# Altium PCB generic-usb-hub.PcbDoc
Units mil, origin at the board's own origin, x right, y up, seen from the top; angles counter-clockwise.
Board outline 1574.8 x 1574.8 mil, 2 copper layers (Top Layer, Bottom Layer); 73 components, 47 nets, 229 pads, 50 vias.
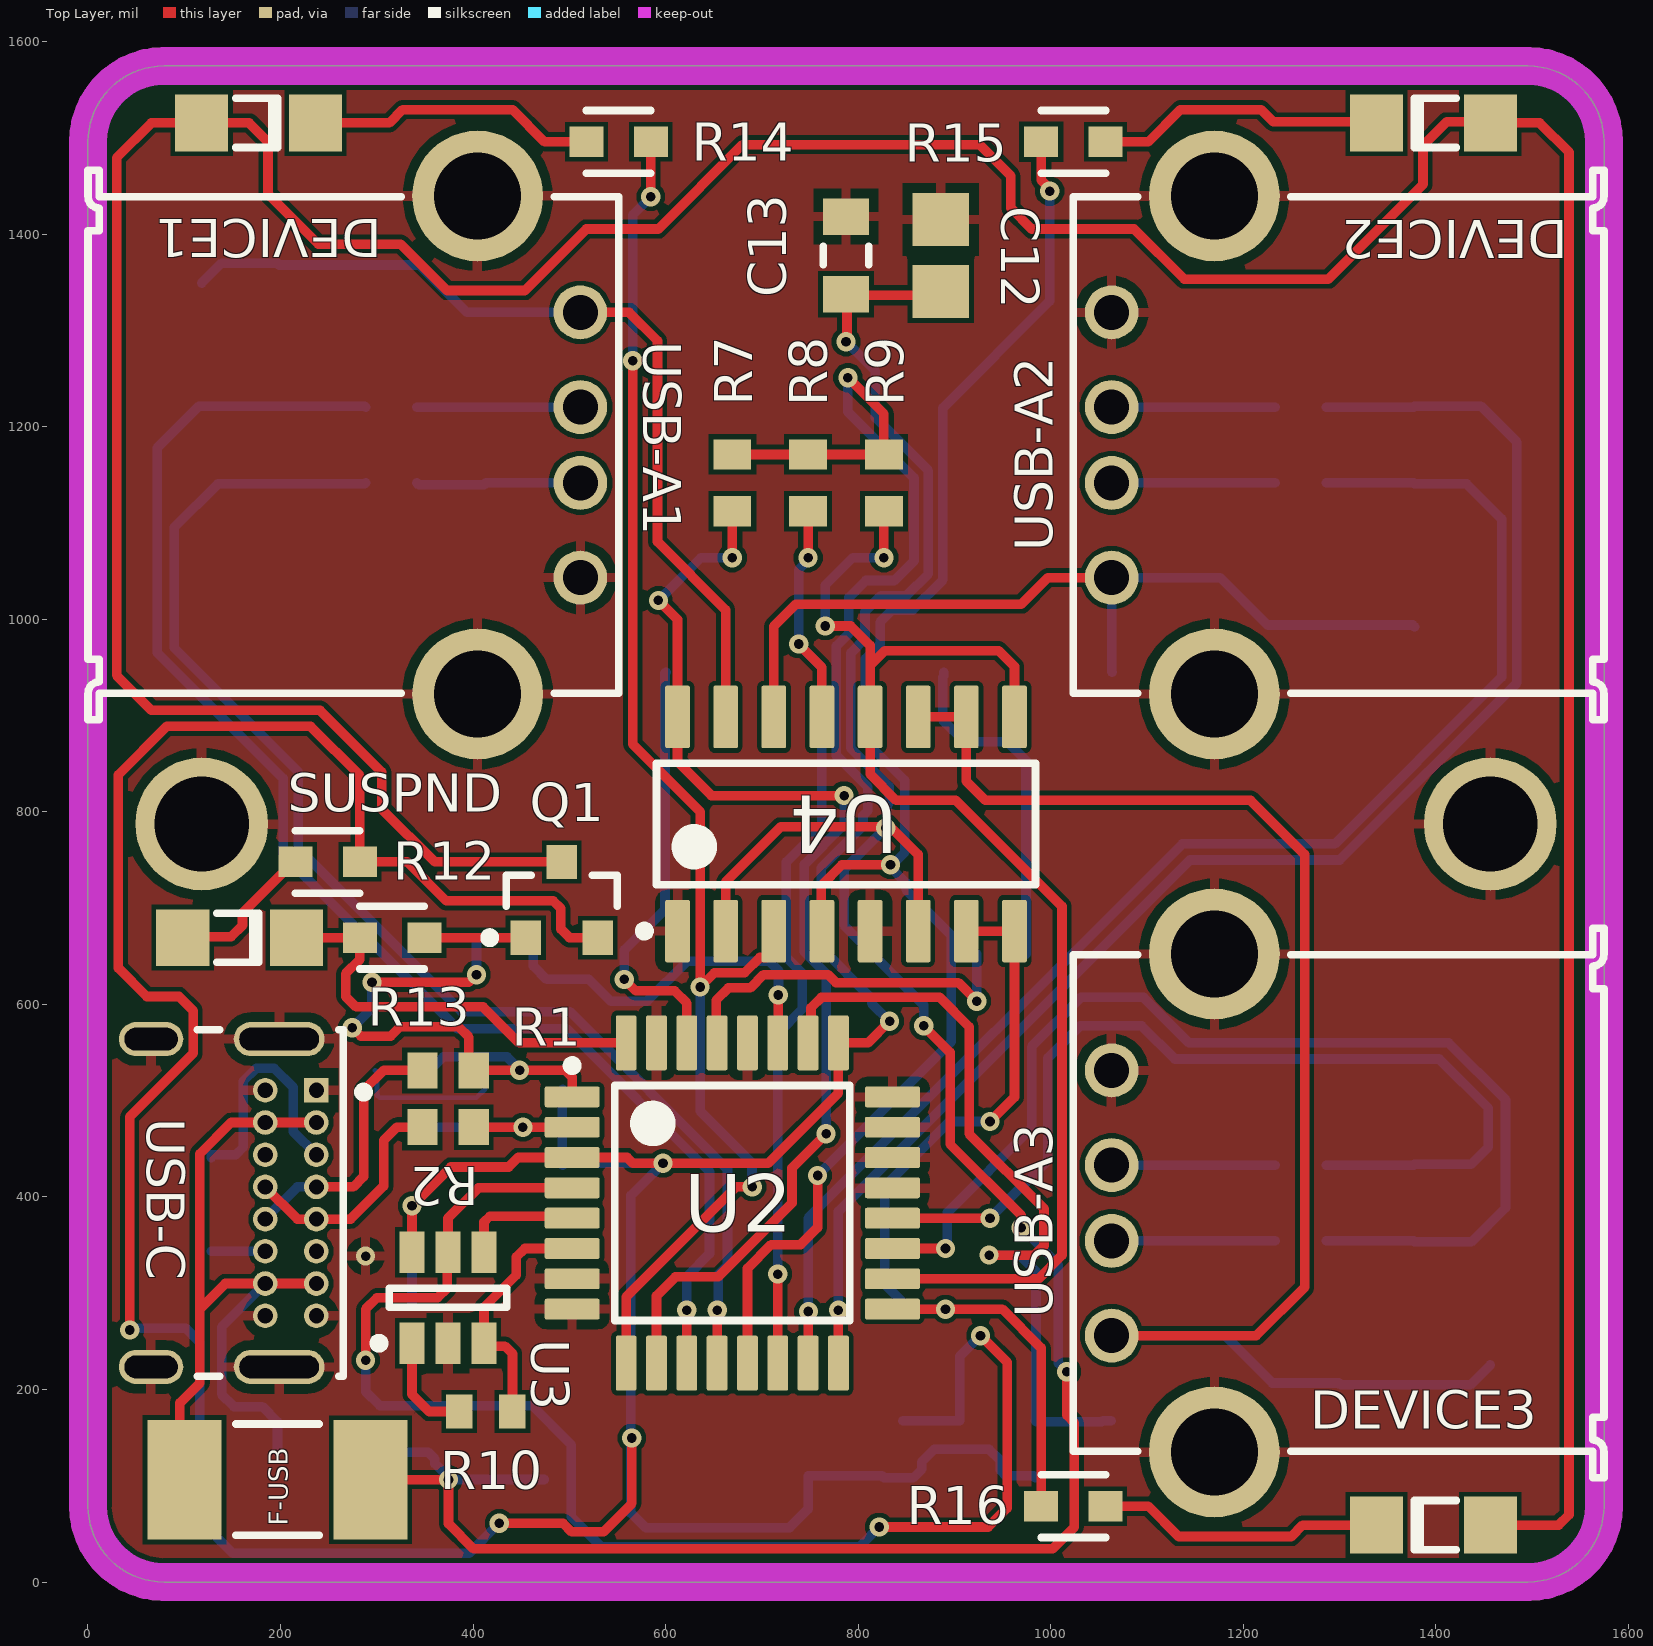
[diagram p0: Top Layer view]
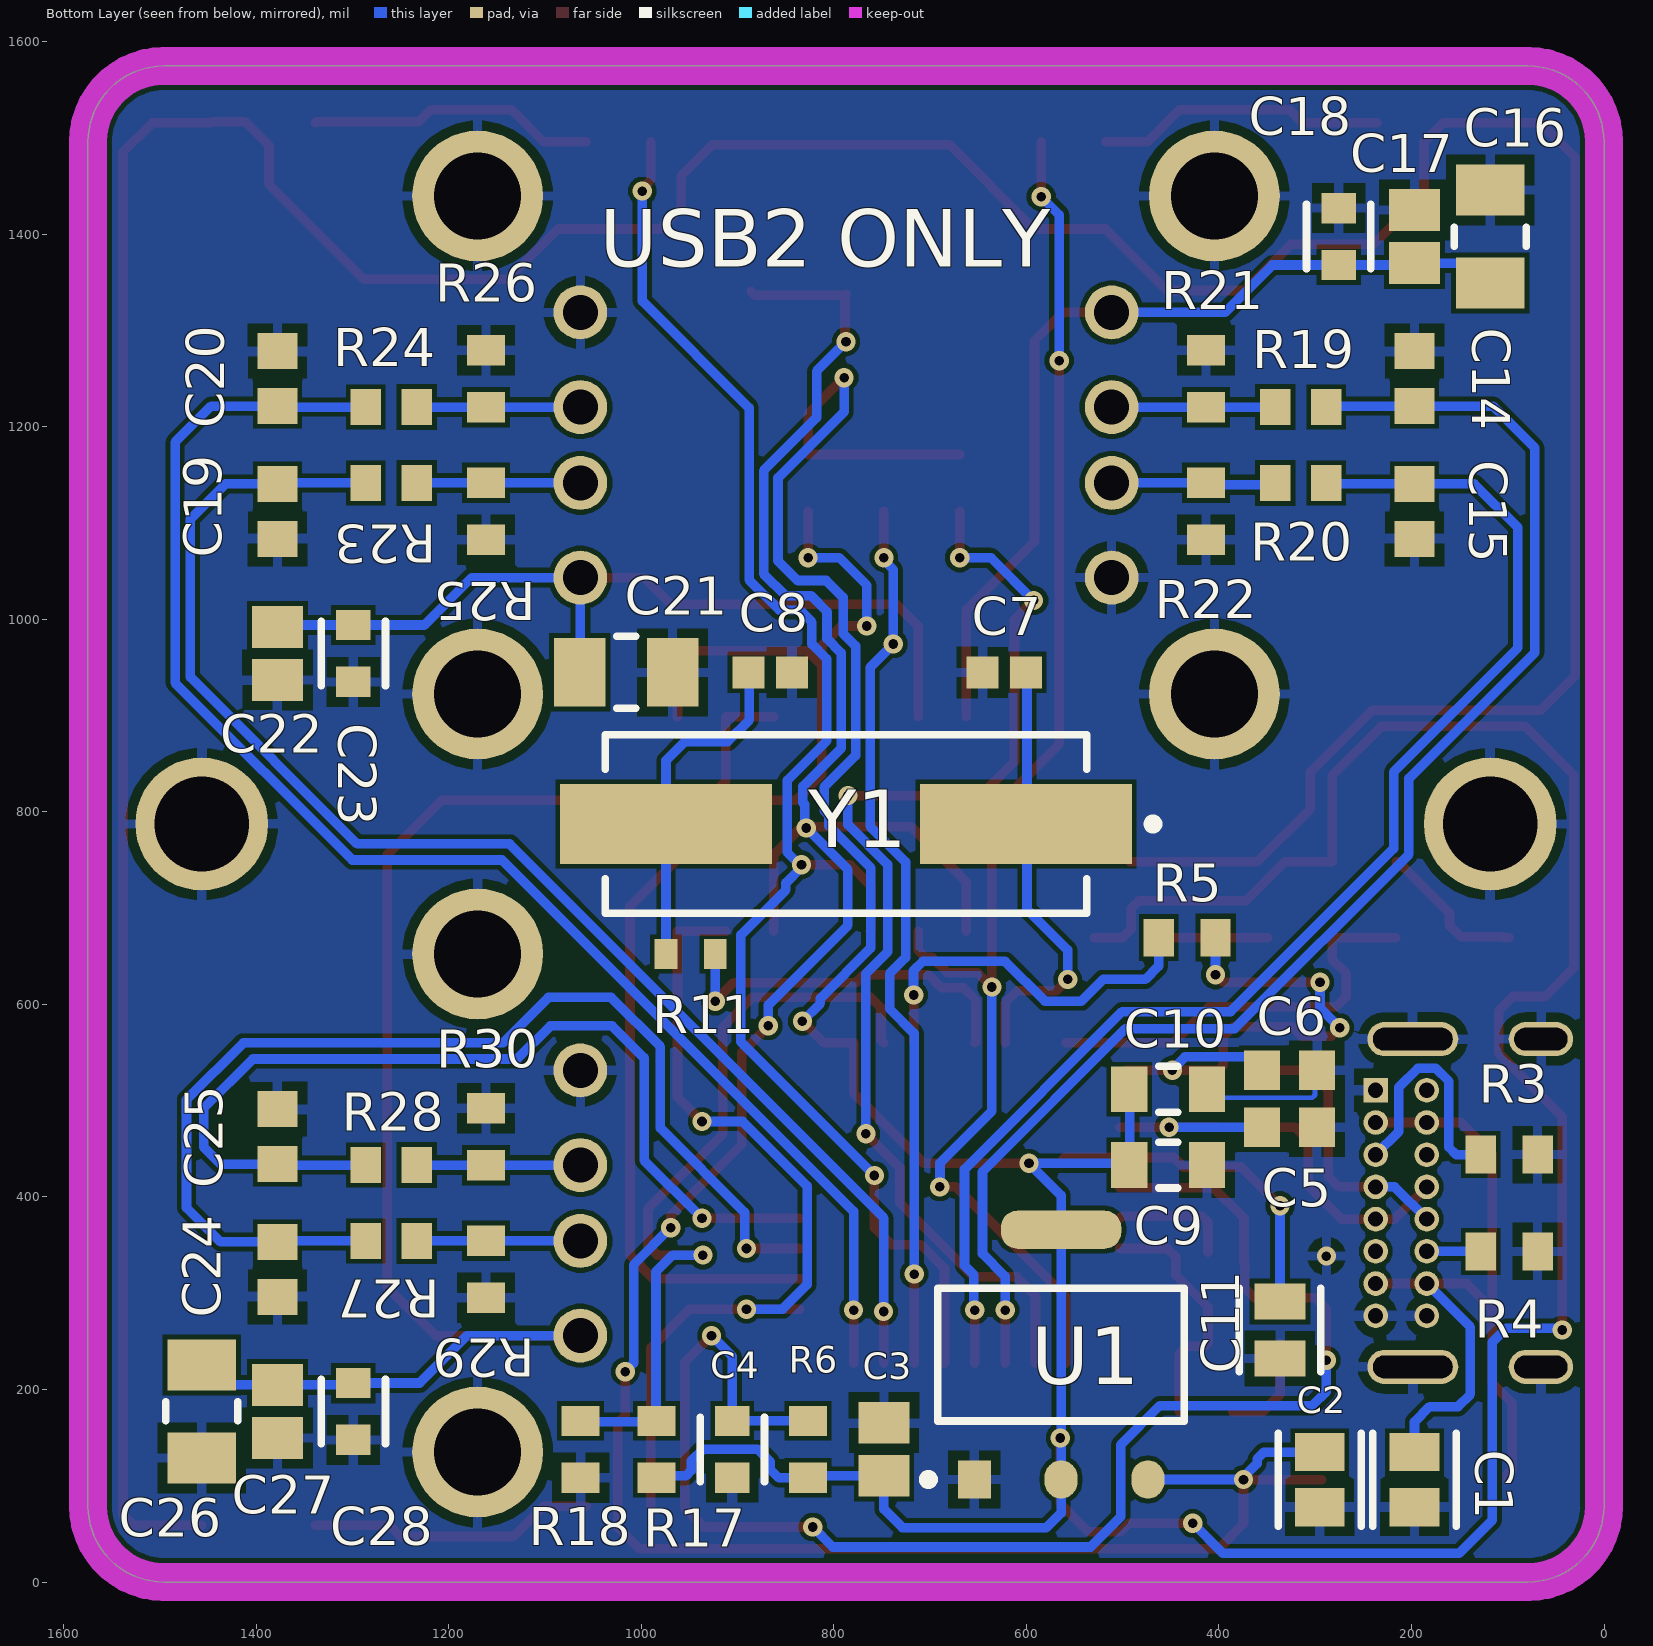
[diagram p1: Bottom Layer view, seen from below]
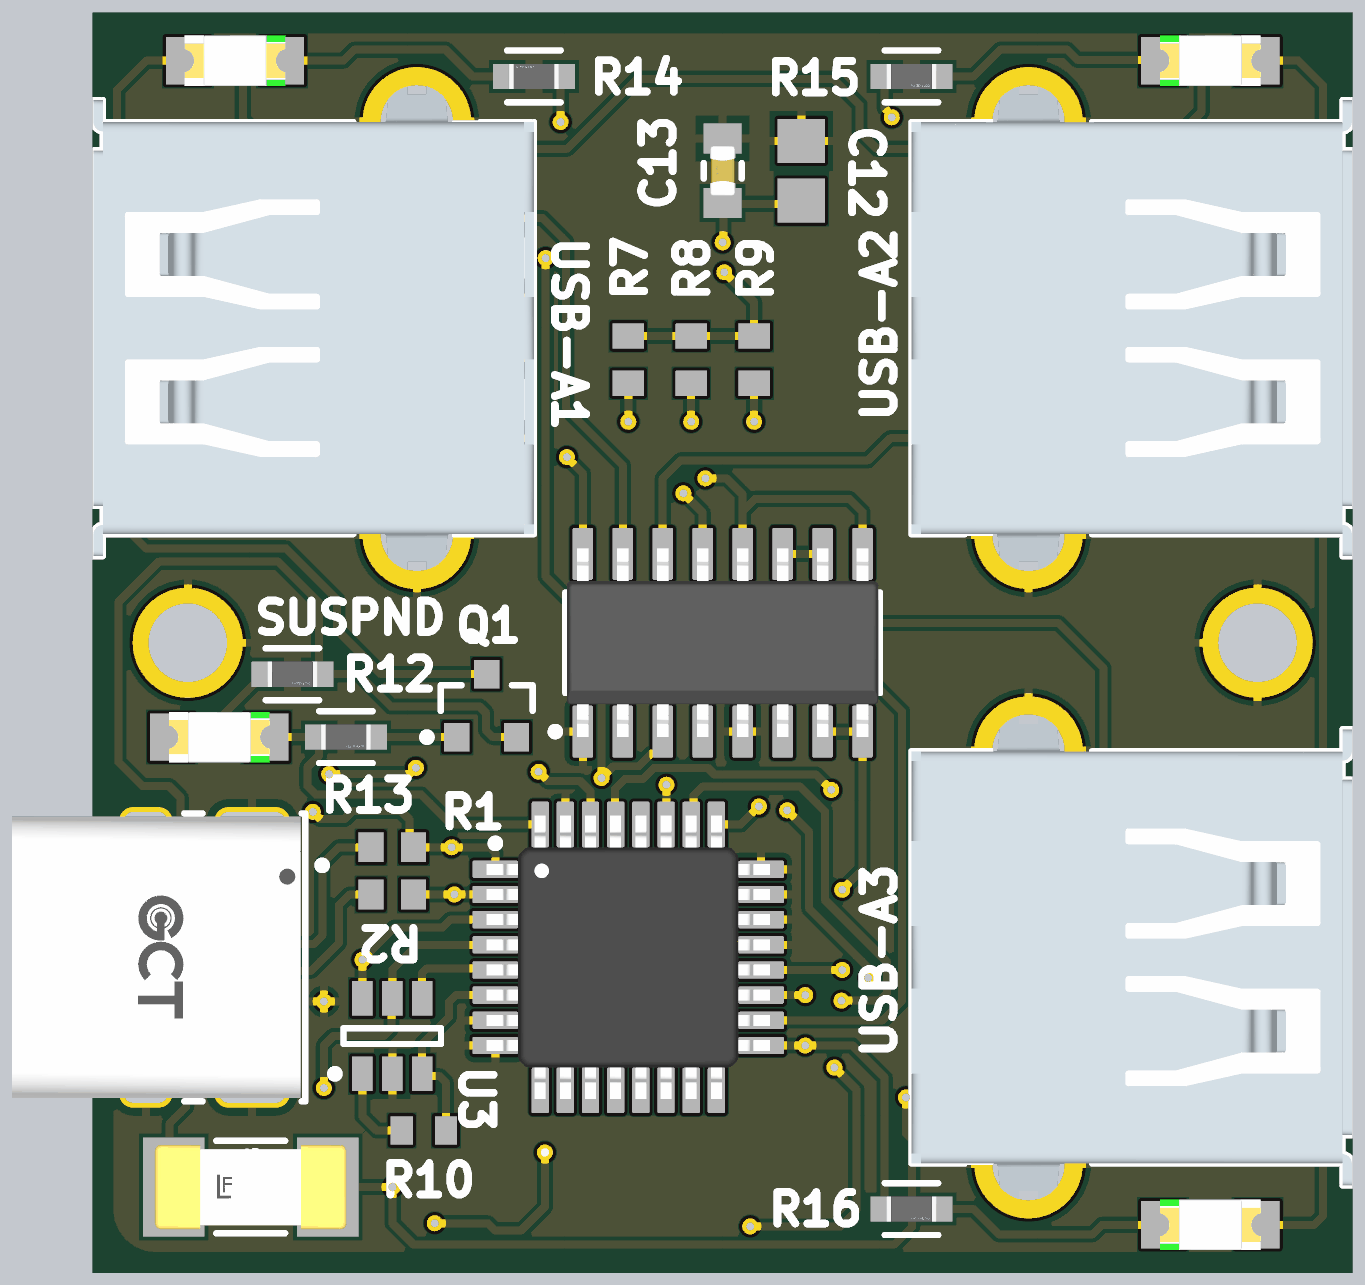
[diagram p2: 3D render of the assembled board from above, using the file's embedded part models]
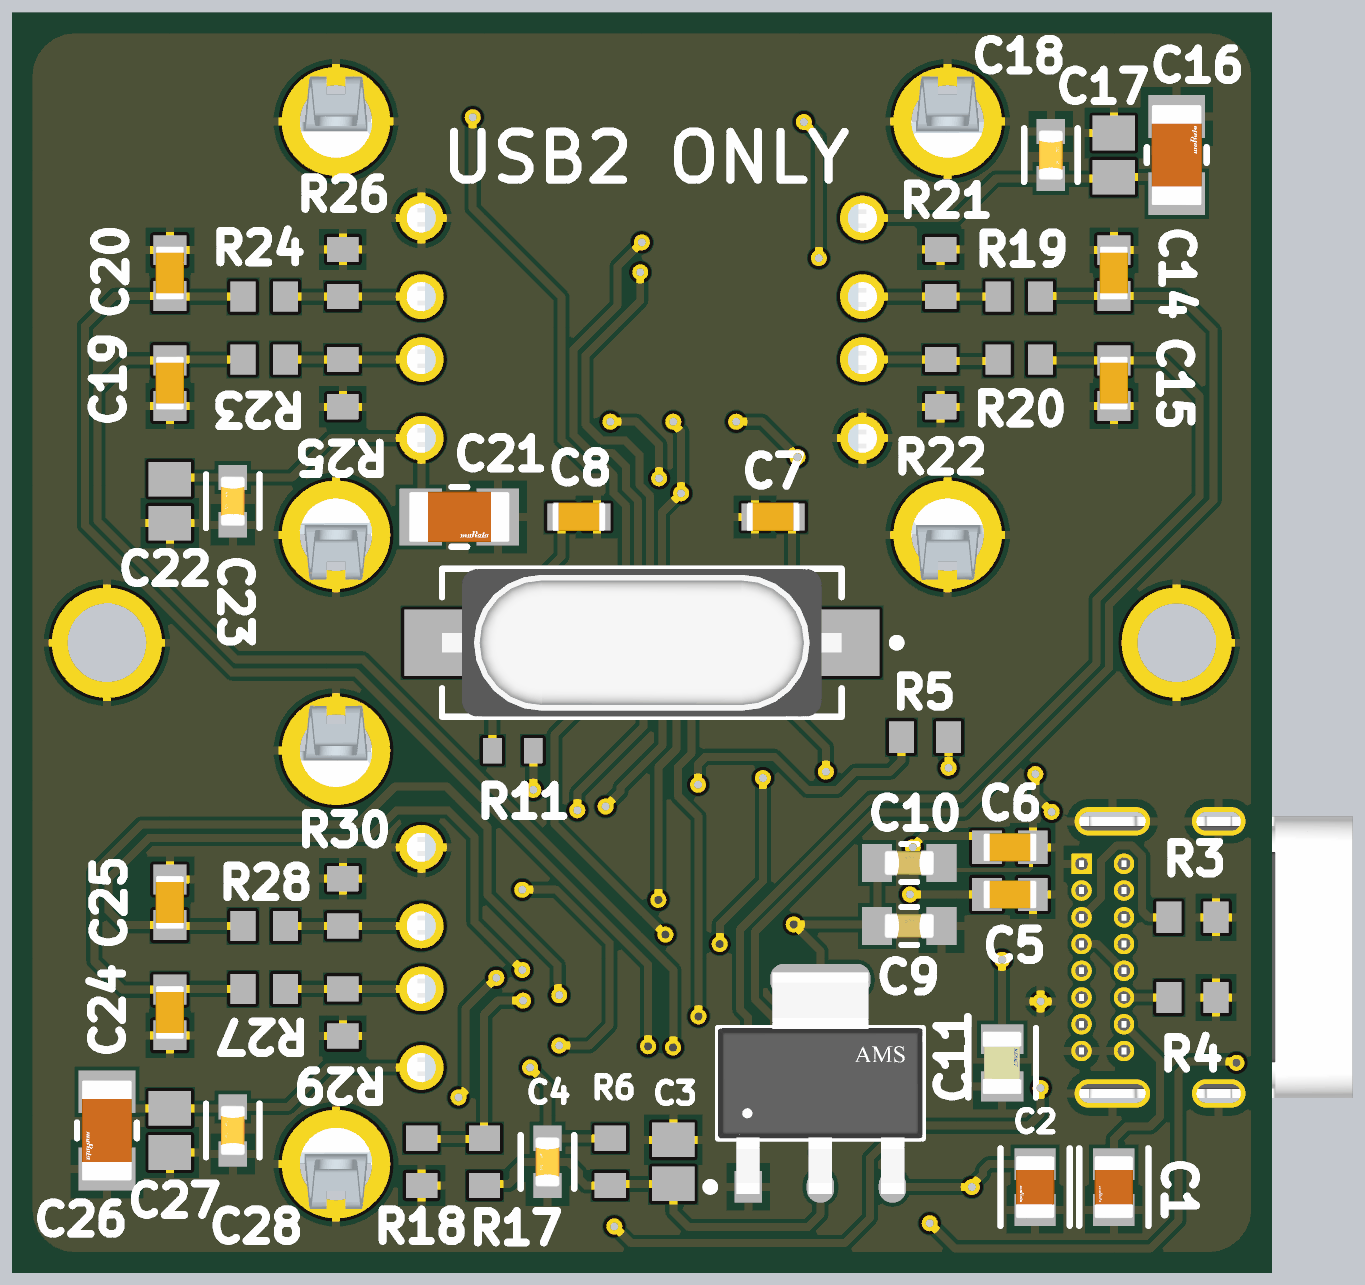
[diagram p3: 3D render of the assembled board from below, using the file's embedded part models]

## Layer stack, top to bottom
Top Solder: solder mask 0.4, Solder Resist, Dk 3.5
Top Layer: signal copper 1.4
Dielectric 1: dielectric 12.6, FR-4, Dk 4.8
Bottom Layer: signal copper 1.4
Bottom Solder: solder mask 0.4, Solder Resist, Dk 3.5

## Board outline
1496.06,0 ccw(c1496.06,78.74) 1574.8,78.74 1574.8,1496.06 ccw(c1496.06,1496.06) 1496.06,1574.8 78.74,1574.8 ccw(c78.74,1496.06) 0,1496.06 0,78.74 ccw(c78.74,78.74) 78.74,0

## Design rules (kind name [scope] priority, off if disabled: settings)
Clearance [All] p1: gap=5 ignorepadtopadclearanceinfootprint=FALSE except(0: Arc-Hole Track-Hole SMDPad-Hole THPad-Hole Via-Hole Fill-Hole Poly-Hole Region-Hole Text-Hole)
PolygonConnect [All] p1: connectstyle=Relief reliefconductorwidth=10 reliefentries=4 polygonreliefangle="90 Angle" airgapwidth=10
RoutingVias [All] p1: holewidth=28 width=50 viastyle="Through Hole" minholewidth=28 minwidth=50 maxholewidth=28 maxwidth=50
SolderMaskExpansion [All] p1: expansion=4 istentingtop=FALSE
Width [All] p1: maxlimit=10 minlimit=5 preferedwidth=10 minimp=50.000000 maximp=50.000000 favimp=50.000000
30 further rules are at their usual default settings.

## Components (designator, comment, footprint, x,y, rotation, side; value= is the part's Value field where it differs from the comment)
C1 "10uF 25V 0805" FP-GRM21B-0_15-IPC_C 196.85,106.3 r270 bottom
C2 "10uF 25V 0805" FP-GRM21B-0_15-IPC_C 295.28,106.3 r270 bottom
C3 "47uF 6.3V 0805" CAPC2013X145X50LL20T25 748.03,137.8 r270 bottom
C4 "1uF 16V 0603" FP-CC0603-DA-MFG 905.51,137.8 r270 bottom value="1 uF"
C5 "22pF 50V 0603" CAPC1608X90X35ML10T15 326.77,472.44 r0 bottom
C6 "22pF 50V 0603" CAPC1608X90X35ML10T15 326.77,531.5 r0 bottom
C7 "33pF 50V 0603" CAPC1608X90X40LL10T20 623.03,944.88 r180 bottom
C8 "33pF 50V 0603" CAPC1608X90X40LL10T20 866.14,944.88 r0 bottom
C9 "100nF 50V 0603" FP-CGA3E-0_3-0_1-IPC_A 452.76,433.07 r180 bottom
C10 "100nF 50V 0603" FP-CGA3E-0_3-0_1-IPC_A 452.76,511.81 r180 bottom
C11 "100nF 50V 0805" FP-C0805C-DN-MFG 336.61,261.81 r270 bottom value="0.10 μF"
C12 "4.7uF 25V 0805" CAPC2013X135X45ML10T25 885.83,1377.95 r270 top
C13 "100nF 50V 0603" FP-CGA3E-0_3-0_1-IPC_A 787.4,1377.95 r90 top
C14 "22pF 50V 0603" CAPC1608X90X35ML10T15 196.85,1250 r270 bottom
C15 "22pF 50V 0603" CAPC1608X90X35ML10T15 196.85,1112.2 r90 bottom
C16 "220uF 6.3V 1206" FP-GRM31C-0_3-e0_3_0_9-IPC_C 118.11,1397.64 r90 bottom
C17 "47uF 6.3V 0805" CAPC2013X145X50LL20T25 196.85,1397.64 r270 bottom
C18 "10nF 50V 0603" FP-CC0603-DA-MFG 275.59,1397.64 r90 bottom value="10 nF"
C19 "22pF 50V 0603" CAPC1608X90X35ML10T15 1377.95,1112.2 r90 bottom
C20 "22pF 50V 0603" CAPC1608X90X35ML10T15 1377.95,1250 r270 bottom
C21 "220uF 6.3V 1206" FP-GRM31C-0_3-e0_3_0_9-IPC_C 1015.75,944.88 r180 bottom
C22 "47uF 6.3V 0805" CAPC2013X145X50LL20T25 1377.95,964.57 r90 bottom
C23 "10nF 50V 0603" FP-CC0603-DA-MFG 1299.21,964.57 r270 bottom value="10 nF"
C24 "22pF 50V 0603" CAPC1608X90X35ML10T15 1377.95,324.8 r90 bottom
C25 "22pF 50V 0603" CAPC1608X90X35ML10T15 1377.95,462.6 r270 bottom
C26 "220uF 6.3V 1206" FP-GRM31C-0_3-e0_3_0_9-IPC_C 1456.69,177.17 r270 bottom
C27 "47uF 6.3V 0805" CAPC2013X145X50LL20T25 1377.95,177.17 r90 bottom
C28 "10nF 50V 0603" FP-CC0603-DA-MFG 1299.21,177.17 r270 bottom value="10 nF"
DEVICE1 "150120BS75000" 1206_A 177.17,1515.75 r180 top
DEVICE2 "150120BS75000" 1206_A 1397.64,1515.75 r0 top
DEVICE3 "150120BS75000" 1206_A 1397.64,59.06 r0 top
F-USB "0451002.MRL" FP-0451-MFG 196.85,106.3 r0 top value=0.0367Ω
Q1 "MMBT3906LT1G" ONSC-SOT-23-3-318-08_V 492.13,708.66 r90 top
R1 "27R 1% 0603" RESC1608X55X30NL15T15 374.02,531.5 r0 top
R2 "27R 1% 0603" RESC1608X55X30NL15T15 374.02,472.44 r0 top
R3 "5K1 1% 0603" RESC1608X55X25ML10T15 98.43,443.9 r0 bottom
R4 "5K1 1% 0603" RESC1608X55X25ML10T15 98.43,343.5 r0 bottom
R5 "1K5 1% 0603" RESC1608X55X25ML10T15 433.07,669.29 r0 bottom
R6 "15K 1% 0603" RESC1608X55X25ML10T15 826.77,137.8 r90 bottom
R7 "15K 1% 0603" RESC1608X55X25ML10T15 669.29,1141.73 r90 top
R8 "15K 1% 0603" RESC1608X55X25ML10T15 748.03,1141.73 r90 top
R9 "15K 1% 0603" RESC1608X55X25ML10T15 826.77,1141.73 r90 top
R10 "1K 1% 0603" RESC1608X55X25NL10T15 413.39,177.17 r180 top
R11 "2K2 1% 0603" RESC1608X55X25LL10T15 948.82,652.36 r180 bottom
R12 "510R 1% 0603" FP-AC0603-MFG 249.02,748.03 r0 top value=510Ω
R13 "510R 1% 0603" FP-AC0603-MFG 315.94,669.29 r0 top value=510Ω
R14 "510R 1% 0603" FP-AC0603-MFG 551.18,1496.06 r180 top value=510Ω
R15 "510R 1% 0603" FP-AC0603-MFG 1023.62,1496.06 r0 top value=510Ω
R16 "510R 1% 0603" FP-AC0603-MFG 1023.62,78.74 r0 top value=510Ω
R17 "100R 1% 0603" RESC1608X55X25ML10T15 984.25,137.8 r270 bottom
R18 "100R 1% 0603" RESC1608X55X25ML10T15 1062.99,137.8 r90 bottom
R19 "27R 1% 0603" RESC1608X55X30NL15T15 314.96,1220.47 r0 bottom
R20 "27R 1% 0603" RESC1608X55X30NL15T15 314.96,1141.73 r0 bottom
R21 "15K 1% 0603" RESC1608X55X25ML10T15 413.39,1250 r270 bottom
R22 "15K 1% 0603" RESC1608X55X25ML10T15 413.39,1112.2 r90 bottom
R23 "27R 1% 0603" RESC1608X55X30NL15T15 1259.84,1141.73 r180 bottom
R24 "27R 1% 0603" RESC1608X55X30NL15T15 1259.84,1220.47 r180 bottom
R25 "15K 1% 0603" RESC1608X55X25ML10T15 1161.42,1112.2 r90 bottom
R26 "15K 1% 0603" RESC1608X55X25ML10T15 1161.42,1250 r270 bottom
R27 "27R 1% 0603" RESC1608X55X30NL15T15 1259.84,354.33 r180 bottom
R28 "27R 1% 0603" RESC1608X55X30NL15T15 1259.84,433.07 r180 bottom
R29 "15K 1% 0603" RESC1608X55X25ML10T15 1161.42,324.8 r90 bottom
R30 "15K 1% 0603" RESC1608X55X25ML10T15 1161.42,462.6 r270 bottom
SUSPND "150120SS75000" 1206_A 157.48,669.29 r180 top
U1 "AMS1117-3.3" FP-AMS1117-IPC_C 563.98,236.22 r90 bottom
U2 "TUSB2036VF" VF0032A_N 669.29,393.7 r0 top
U3 "93AA46BT-I/OT" SOT-23-OT6_N 374.02,295.28 r90 top
U4 "TPS2044BDR" D0016A_M 787.4,787.4 r90 top
USB-A1 "61400416021" 61400416021 275.59,1181.1 r270 top
USB-A2 "61400416021" 61400416021 1299.21,1181.1 r90 top
USB-A3 "61400416021" 61400416021 1299.21,393.7 r90 top
USB-C "USB4085-GF-A" FP-USB4085-GF-A-MFG 78.74,393.7 r270 top
Y1 "HC49USM-FF3F18-6.000MHZ" ABRA-ABLS-14.7456MHZ-B2-T_V 787.4,787.4 r0 bottom

## Footprints (in the part's own frame and the unit in brackets; to place one, negate y for a bottom-side part, rotate by r counter-clockwise, add the part's x,y. Pads: shape width x height; smd on the part's side, far side on the other; paste and mask are expansions set on the pad)
1206_A [mm] "Chip LED, 2-Leads, Body 3.2x1.6mm, IPC Medium Density"
  rect 1.4x1.5 smd: 1(-1.5,0) 2(1.5,0)
  silkscreen extent -0.5,-0.67 0.6,0.65, body extent -1.6,-0.8 1.6,0.8, height 0.68
61400416021 [mm] "USB 2.0 Type A Horizontal"
  round 1.42 hole 0.92: 1(-3.5,5.99) 2(-1,5.99) 3(1,5.99) 4(3.5,5.99)
  round 3.45 hole 2.3: Shell(-6.57,3.28) Shell(6.57,3.28)
  silkscreen extent -7.25,-7 7.25,7, body extent -8,-7 8,7, height 7.63
ABRA-ABLS-14.7456MHZ-B2-T_V [mm] "SMD, 2-Leads, Body 11.4x4.7mm"
  rect 5.6x2.1 smd: 1(-4.75,0) 2(4.75,0)
  silkscreen extent -8.22,-2.35 6.35,2.35, body extent -6.35,-2.35 6.35,2.35, height 4.16
CAPC1608X90X35ML10T15 [mm] "Chip Capacitor, 2-Leads, Body 1.7x0.9mm, IPC Low Density"
  rect 0.95x1.05 smd: 1(-0.725,0) 2(0.725,0)
  body extent -0.85,-0.45 0.85,0.45, height 0.9
CAPC1608X90X40LL10T20 [mm] "Chip Capacitor, 2-Leads, Body 1.70x0.90mm, IPC High Density"
  rect 0.85x0.85 smd: 1(-0.575,0) 2(0.575,0)
  body extent -0.85,-0.45 0.85,0.45, height 0.9
CAPC2013X135X45ML10T25 [mm] "Chip Capacitor, 2-Leads, Body 2.00x1.25mm, IPC Low Density"
  rect 1.4x1.5 smd: 1(-0.95,0) 2(0.95,0)
  body extent -1.05,-0.67 1.05,0.67, height 1.35
CAPC2013X145X50LL20T25 [mm] "Chip Capacitor, 2-Leads, Body 2.00x1.25mm, IPC High Density"
  rect 1.1x1.35 smd: 1(-0.7,0) 2(0.7,0)
  body extent -1.1,-0.72 1.1,0.72, height 1.45
D0016A_M [mm] "SOIC, 16-Leads, Body 10x4mm, Pitch 1.27mm, IPC Low Density"
  rrect15% 1.65x0.65 smd: 1(-2.825,4.445) 2(-2.825,3.175) 3(-2.825,1.905) 4(-2.825,0.635) 5(-2.825,-0.635) 6(-2.825,-1.905) 7(-2.825,-3.175) 8(-2.825,-4.445) 9(2.825,-4.445) 10(2.825,-3.175) 11(2.825,-1.905) 12(2.825,-0.635) 13(2.825,0.635) 14(2.825,1.905) 15(2.825,3.175) 16(2.825,4.445)
  silkscreen extent -2.95,-5 1.6,5.44, body extent -3,-4.95 3,4.95, height 1.59
FP-0451-MFG [mil]
  rect 77x124 smd paste+0 mask+0: 1(-96.5,0) 2(96.5,0)
  silkscreen extent -43,-58 43,58, body extent -139,-66 139,66, height 10
FP-AC0603-MFG [mm]
  rect 0.9x0.8 smd paste+0 mask+0: 1(-0.85,0) 2(0.85,0)
  silkscreen extent -0.85,-0.82 0.85,0.82, body extent -1.4,-0.55 1.4,0.55, height 0.25
FP-AMS1117-IPC_C [mm]
  rect 1.004x0.872 smd paste+0 mask+0: 1(-3.295,2.29)
  rrect100% 1.004x0.872 smd paste+0 mask+0: 2(-3.295,0) 3(-3.295,-2.29)
  rrect87% 1.004x3.182 smd paste+0 mask+0: 4(3.295,0)
  silkscreen extent -3.42,-3.25 1.75,3.63, body extent -3.53,-3.25 3.53,3.25, height 1.8
FP-C0805C-DN-MFG [mm]
  rect 0.95x1.35 smd paste+0 mask+0: 1(-0.75,0) 2(0.75,0)
  silkscreen extent -1.1,-1.07 1.1,1.07, body extent -1,-0.63 1,0.63, height 0.88
FP-CC0603-DA-MFG [mm]
  rect 0.8x0.9 smd paste+0 mask+0: 1(-0.75,0) 2(0.75,0)
  silkscreen extent -0.85,-0.85 0.85,0.85, body extent -0.8,-0.4 0.8,0.4, height 0.9
FP-CGA3E-0_3-0_1-IPC_A [mm]
  rect 0.956x1.206 smd paste+0 mask+0: 1(-1.025,0) 2(1.025,0)
  silkscreen extent -0.25,-0.6 0.25,0.6, body extent -0.8,-0.4 0.8,0.4, height 1.1
FP-GRM21B-0_15-IPC_C [mil]
  rect 39.6x51.5 smd paste+0 mask+0: 1(-28.59,0) 2(28.59,0)
  silkscreen extent -48,-43 48,43, body extent -39,-25 39,25, height 55
FP-GRM31C-0_3-e0_3_0_9-IPC_C [mil]
  rect 53.28x71.03 smd paste+0 mask+0: 1(-48.25,0) 2(48.25,0)
  silkscreen extent -10,-37 10,37, body extent -63,-31 63,31, height 75
FP-USB4085-GF-A-MFG [mm]
  rrect100% 0.9x2.4 hole 2.1 slot 0.6 at 0 deg paste-1000 mask+0: 1(-4.325,3.045) 2(4.325,3.045)
  rrect100% 0.9x1.7 hole 1.4 slot 0.6 at 0 deg paste-1000 mask+0: 3(-4.325,-0.335) 4(4.325,-0.335)
  rect 0.65x0.65 hole 0.4 paste-1000 mask+0: A1(-2.975,4.025)
  round 0.65 hole 0.4 paste-1000 mask+0: A4(-2.125,4.025) A5(-1.275,4.025) A6(-0.425,4.025) A7(0.425,4.025) A8(1.275,4.025) A9(2.125,4.025) A12(2.975,4.025) B1(2.975,2.675) B4(2.125,2.675) B5(1.275,2.675) B6(0.425,2.675) B7(-0.425,2.675) B8(-1.275,2.675) B9(-2.125,2.675) B12(-2.975,2.675)
  silkscreen extent -4.57,0.89 4.57,5.4, body extent -4.87,-4.83 4.87,4.83, height 0.25
ONSC-SOT-23-3-318-08_V [mm] "SOT23, 3-Leads, Body 2.92x1.3mm, Pitch 0.95mm"
  rect 0.9x0.8 smd: 1(-1,0.95) 2(-1,-0.95) 3(1,0)
  silkscreen extent -1.12,-1.46 0.65,2.02, body extent -0.65,-1.46 0.65,1.46, height 1.11
RESC1608X55X25LL10T15 [mm] "Chip Resistor, 2-Leads, Body 1.60x0.80mm, IPC High Density"
  rect 0.6x0.8 smd: 1(-0.65,0) 2(0.65,0)
  body extent -0.85,-0.45 0.85,0.45, height 0.55
RESC1608X55X25ML10T15 [mm] "Chip Resistor, 2-Leads, Body 1.60x0.80mm, IPC Low Density"
  rect 0.8x1 smd: 1(-0.75,0) 2(0.75,0)
  body extent -0.85,-0.45 0.85,0.45, height 0.55
RESC1608X55X25NL10T15 [mm] "Chip Resistor, 2-Leads, Body 1.70x0.90mm, IPC Medium Density"
  rect 0.7x0.9 smd: 1(-0.7,0) 2(0.7,0)
  body extent -0.85,-0.45 0.85,0.45, height 0.55
RESC1608X55X30NL15T15 [mm] "Chip Resistor, 2-Leads, Body 1.60x0.80mm, IPC Medium Density"
  rect 0.8x0.95 smd: 1(-0.675,0) 2(0.675,0)
  body extent -0.87,-0.48 0.87,0.48, height 0.55
SOT-23-OT6_N [mm] "SOT23, 6-Leads, Body 2.9x1.7mm, Pitch 0.95mm, Lead Span 2.8mm, IPC Medium Density"
  rect 1.1x0.65 smd: 1(-1.2,0.95) 2(-1.2,0) 3(-1.2,-0.95) 4(1.2,-0.95) 5(1.2,0) 6(1.2,0.95)
  silkscreen extent -1.32,-1.55 0.25,1.95, body extent -0.9,-1.55 0.9,1.55, height 1.45
VF0032A_N [mm] "QFP, 32-Leads, Body 7x7mm, Pitch 0.8mm, IPC Medium Density"
  rrect18% 1.45x0.55 smd: 1(-4.225,2.8) 2(-4.225,2) 3(-4.225,1.2) 4(-4.225,0.4) 5(-4.225,-0.4) 6(-4.225,-1.2) 7(-4.225,-2) 8(-4.225,-2.8) 17(4.225,-2.8) 18(4.225,-2) 19(4.225,-1.2) 20(4.225,-0.4) 21(4.225,0.4) 22(4.225,1.2) 23(4.225,2) 24(4.225,2.8)
  rrect18% 0.55x1.45 smd: 9(-2.8,-4.225) 10(-2,-4.225) 11(-1.2,-4.225) 12(-0.4,-4.225) 13(0.4,-4.225) 14(1.2,-4.225) 15(2,-4.225) 16(2.8,-4.225) 25(2.8,4.225) 26(2,4.225) 27(1.2,4.225) 28(0.4,4.225) 29(-0.4,4.225) 30(-1.2,4.225) 31(-2,4.225) 32(-2.8,4.225)
  silkscreen extent -4.35,-3.1 3.1,3.75, body extent -4.51,-4.51 4.51,4.51, height 1.6

## Part data
C1 C2: library part CMP-2007-03541-2, "Chip Multilayer Ceramic Capacitors for General Purpose, 0805, 10uF, X5R, 15%, 10%, 25V", Capacitance=10uF, Case Code (Imperial)=0805, Case Code (Metric)=2012, Dielectric=X5R, Max Operating Temperature=85°C, Min Operating Temperature=-55°C, Package Quantity=1, Tolerance=10%, Voltage=25V, Case/Package=0805, Depth=1.25mm, Height=1.25mm, Lead Free="Lead Free", Length=2mm, Material=Ceramic, Mount="Surface Mount", Packaging="Tape and Reel", Radiation Hardening=No, Termination=SMD/SMT, Thickness=0.053inch, Voltage Rating=25V, Voltage Rating (DC)=25V, Width=0.049inch
C3 C17 C22 C27: library part CMP-2007-01008-1, Manufacturer=Kemet, Part Number=C0805C476M9PACTU
C4: library part CMP-03422-000924-1, "CAP CER 1UF 16V X7R 0603", Capacitance="1 uF", Manufacturer=YAGEO, Manufacturer Part Number=CC0603KRX7R7BB105, Package=CC0603-DA, Temperature="-55°C to +125°C", Temperature Characteristic=X7R, Temperature Coefficient=15%, Temperature Range High=+125°C, Temperature Range Low=-55°C, Tolerance=0.1, Voltage="16 V", Automotive=No, Category=Cap, ComponentLink2Description=Datasheet, ComponentLink2URL=http://www.yageo.com/documents/recent/UPY-GPHC_X7R_6.3V-to-50V_18.pdf, Device Class L1="Passive Components", Device Class L2=Capacitors, Device Class L3="Ceramic Capacitors", Digikey Description="CAP CER 1UF 16V X7R 0603", Footprint Url=http://www.yageo.com/exep/pages/download/literatures/UPY-C_GEN_24.pdf, Height=0.9mm, Lead Free=Yes, Material=Ceramic, Mouser Description="Multilayer Ceramic Capacitor, CC Series, 1 - F, - 10%, X7R, 16 V, 0603 [1608 Metric]", Octopart=https://octopart.com/cc0603krx7r7bb105-yageo-42271928, RoHS=TRUE, Voltage Rating="16 V"
C5 C6 C14 C15 C19 C20 C24 C25: library part CMP-2000-04945-1, "Chip Capacitor, 22 pF, +/- 5%, 50 V, -55 to 125 degC, 0603 (1608 Metric), RoHS, Tape and Reel", Capacitance=22pF, Case Size/Dimension=0603, Dielectric=C0G, Manufacturer=Murata, Package Description="2-Pin Surface Mount Device, Body 1.6 x 0.8 mm", Package Reference=603, Rated Voltage=50V, Tolerance (%)=±5%, Datasheet URL=https://datasheet.ciiva.com/11786/0900766b807a1cab-11786398.pdf, Datasheet Version=Jul-06, Manufacturer URL=http://www.murata.com/
C7 C8: library part CMP-2000-06072-1, "Chip Capacitor, 33 pF, +/- 5%, 50 V, -55 to 125 degC, 0603 (1608 Metric), RoHS, Tape and Reel", Capacitance=33pF, Manufacturer=Yageo, Operating Temperature=-55°C~125°C, Package / Case=0603(1608Metric), Package Description="2-Pin Surface Mount Device, Body 1.6 x 0.8 mm", Package Reference=0603, Ratings=-, Standard Package=4,000, Temperature Coefficient=C0G,NP0, Tolerance=±5%, Voltage - Rated=50V, Applications=GeneralPurpose, Category=Capacitors, Datasheet URL=http://www.yageo.com/NewPortal/yageodocoutput?fileName=/pdf/MLCC/UPY-GP_NP0_16V-to-50V_14.pdf, Datasheet Version="Rev. 14, 07/2016", Family=CeramicCapacitors, Featured Product=CommodityMultilayerCeramicCapacitors–CCSeries, Features=-, Height - Seated (Max)=-, Lead Spacing=-, Lead Style=-, Manufacturer URL=http://www.yageo.com/, Mounting Technology=SurfaceMount, Mounting Type=SurfaceMount,MLCC, Online Catalog=CCSeries, Other Names=0603CG330J9B200223886715339223886715339311-1064-2311-1282-2311-1282-2-NDCC0603JRNP09BN330BCC0603JRNPO9BN330B, Packaging=Tape&Reel(TR), Product Training Modules=MultilayerCeramicCapacitors, Series=CC, Size / Dimension="0.063\"Lx0.031\"W(1.60mmx0.80mm)", Thickness (Max)="0.035\"(0.90mm)"
C9 C10 C13: library part CMP-2000-07546-2, "Cap Ceramic 100nF 50V X7R 10% Pad SMD 0603 +125°C Automotive T/R", Capacitance=100nF, Case Code (Imperial)=0603, Case Code (Metric)=1608, Dielectric=X7R, Max Operating Temperature=125°C, Min Operating Temperature=-55°C, Package Quantity=1, Ratings=AEC-Q200, Tolerance=10%, Voltage=50V, Case/Package=0603, Composition=Ceramic, Depth=0.8mm, Height=0.8mm, Lead Free="Lead Free", Length=1.6mm, Mount="Surface Mount", Packaging="Tape and Reel", Radiation Hardening=No, REACH SVHC="No SVHC", Termination=SMD/SMT, Thickness=0.035inch, Voltage Rating=50V, Voltage Rating (DC)=50V, Weight=7.1E-05oz, Width=0.8mm
C11: library part CMP-2007-00279-2, "CAP CER 0.1UF 50V X7R 0805", Capacitance="0.10 μF", Manufacturer=KEMET, Manufacturer Part Number=C0805C104K5RACTU, Package=C0805C-DN, Temperature="-55°C to +125°C", Temperature Characteristic=X7R, Temperature Coefficient=30ppm/°C, Temperature Range High=+125°C, Temperature Range Low=-55°C, Tolerance=0.1, Voltage Rating="50 V", Automotive=No, Category=Cap, ComponentLink2Description=Datasheet, ComponentLink2URL=https://content.kemet.com/datasheets/KEM_C1003_C0G_SMD.pdf, Device Class L1="Passive Components", Device Class L2=Capacitors, Device Class L3="Ceramic Capacitors", Digikey Description="CAP CER 0.1UF 50V X7R 0805", Height=0.88mm, Ipc Land Pattern Name=CAPC200125X78, Lead Free=Yes, Material=Ceramic, Mouser Description="Cap Ceramic 0.1uF 50V X7R 10% SMD 2.0 x 1.2 mm 125 C Paper T/R", Octopart=https://octopart.com/c0805c104k5ractu-kemet-143926, RoHS=TRUE
C12: library part CMP-2007-03546-1, Manufacturer=Murata, Part Number=GRM21BR61E475MA12L
C16 C21 C26: library part CMP-06035-000079-2, "Chip Multilayer Ceramic Capacitors for General Purpose, 1206, 220uF, X5R, 15%, 20%, 6.3V", Capacitance=220uF, Case Code (Imperial)=1206, Case Code (Metric)=3216, Dielectric=X5R, Max Operating Temperature=85°C, Min Operating Temperature=-55°C, Tolerance=20%, Voltage Rating=6.3V, Case/Package=1206, Length=0.126inch, Mount="Surface Mount", Packaging="Cut Tape", REACH SVHC="No SVHC", Thickness=0.075inch, Voltage Rating (DC)=6.3V, Width=0.063inch
C18 C23 C28: library part CMP-2100-03600-2, "CAP CER 10000PF 50V X7R 0603", Capacitance="10 nF", Manufacturer=YAGEO, Manufacturer Part Number=CC0603KRX7R9BB103, Package=CC0603-DA, Temperature="-55°C to +125°C", Temperature Characteristic=X7R, Temperature Coefficient=15%, Temperature Range High=+125°C, Temperature Range Low=-55°C, Tolerance=0.1, Voltage="50 V", Automotive=No, Category=Cap, ComponentLink2Description=Datasheet, ComponentLink2URL=http://www.yageo.com/documents/recent/UPY-GPHC_X7R_6.3V-to-50V_18.pdf, Device Class L1="Passive Components", Device Class L2=Capacitors, Device Class L3="Ceramic Capacitors", Digikey Description="CAP CER 10000PF 50V X7R 0603", Footprint Url=http://www.yageo.com/exep/pages/download/literatures/UPY-C_GEN_24.pdf, Height=0.9mm, Lead Free=Yes, Material=Ceramic, Mouser Description="Multilayer Ceramic Capacitor, CC Series, 0.01 - F, - 10%, X7R, 50 V, 0603 [1608 Metric]", Octopart=https://octopart.com/cc0603krx7r9bb103-yageo-192938, RoHS=TRUE, Voltage Rating="50 V"
DEVICE1 DEVICE2 DEVICE3: library part CMP-1426-00015-1, "SMD mono-color Chip LED, WL-SMCW, Blue", Color=Blue, Manufacturer="Wuerth Elektronik", ComponentLink1Description="Manufacturer URL", ComponentLink1URL=http://www.we-online.com, ComponentLink2Description=Datasheet, ComponentLink2URL=http://katalog.we-online.com/led/datasheet/150120BS75000.pdf, PackageReference=1206_A, PartNumber=150120BS75000
F-USB: library part CMP-08605-000053-1, "FUSE BOARD MNT 2A 125VAC/VDC SMD", Fuse Current=2A, Fuse Interrupt Ac Current=50A, Manufacturer=Littelfuse, Max Fuse Ac Voltage=125V, Package=0451, Resistance=0.0367Ω, Temperature="-55°C to +125°C", Temperature Range High=+125°C, Temperature Range Low=-55°C, Automotive=No, Category=Fuse, ComponentLink2Description=Datasheet, ComponentLink2URL=https://www.littelfuse.com/~/media/electronics/datasheets/fuses/littelfuse_fuse_451_453_datasheet.pdf.pdf, Device Class L1="Circuit Protection", Device Class L2=Fuses, Device Class L3=unset, Digikey Description="FUSE BOARD MNT 2A 125VAC/VDC SMD", Fuse Blow Speed=Fast, Fuse I2T=0.53A2Sec, Fuse Interrupt Dc Current=50A, Height=2.94mm, Lead Free=Yes, Manufacturer Part Number=0451002.MRL, Max Fuse Dc Voltage=125V, Mouser Description="Surface Mount Fuses 125V 2A", Octopart=https://octopart.com/0451002.mrl-littelfuse-566376, RoHS=TRUE, Voltage Rating=125V
Q1: library part CMP-1048-00670-1, "General Purpose Transistor, PNP Silicon, 3-Pin SOT-23, Pb-Free, Tape and Reel", Manufacturer="On Semiconductor", ComponentLink1Description="Manufacturer URL", ComponentLink1URL=http://www.onsemi.com/, ComponentLink2Description=Datasheet, ComponentLink2URL=http://www.onsemi.cn/pub_link/Collateral/MMBT3906LT1-D.PDF, ComponentLink3Description="Package Specification", ComponentLink3URL=http://www.onsemi.cn/pub_link/Collateral/318-08.PDF, DatasheetVersion="Rev. 11", fT Min (MHz)=250, IC Continuous (A)=-0.2, Mounting Technology="Surface Mount", PackageDescription="3-Pin Small Outline Transistor, Body 2.92 x 1.3 mm, Pitch 0.95 mm", PackageReference=SOT-23-3-318-08, PackageVersion="Rev. AP, 11/2009", Packing="Tape and Reel", PartNumber=MMBT3906LT1G, Polarity=PNP, RoHS=TRUE
R1 R2 R19 R20 R23 R24 R27 R28: library part CMP-2000-00396-1, Manufacturer=Panasonic, Part Number=ERJ3EKF27R0V
R3 R4: library part CMP-2000-04091-1, Manufacturer=Yageo, Part Number=RC0603FR-075K1L
R5: library part CMP-2100-03665-1, "Chip Resistor, 1.5 KOhm, +/- 1%, 0.1 W, -55 to 155 degC, 0603 (1608 Metric), RoHS, Tape and Reel", Case Code (Imperial)=0603, Case Code (Metric)=1608, Manufacturer=Yageo, Max Operating Temperature=155degC, Max Power Dissipation=100mW, Min Operating Temperature=-55degC, Package Description="2-Pin Surface Mount Device, Body 1.6 x 0.8 mm", Package Quantity=1, Resistance=1.5KOhm, Temperature Coefficient=100ppm/degreesC, Tolerance=1%, Voltage Rating=50V, Case/Package=0603, Composition=ThickFilm, Datasheet URL=http://www.yageo.com/NewPortal/yageodocoutput?fileName=/pdf/R-Chip/PYu-RC_Group_51_RoHS_L_5.pdf, Datasheet Version="Rev. 5, 10/2016", Depth=0.8mm, Height=0.022inch, Lead Free=LeadFree, Length=0.063inch, Manufacturer URL=http://www.yageo.com/, Military Standard=Not, Number of Pins=2, Number of Terminations=2, Package Reference=0603, Packaging=TapeandReel, Power Rating=100mW, REACH SVHC=NoSVHC, RoHSCompliant=true, Termination=SMD/SMT, Voltage Rating (DC)=50V, Width=0.031inch
R6 R7 R8 R9 R21 R22 R25 R26 R29 R30: library part CMP-1659-00032-1, "Chip Resistor, 15 KOhm, +/- 1%, 0.1 W, -55 to 155 degC, 0603 (1608 Metric), RoHS, Tape and Reel", ComponentLink1Description="Manufacturer URL", ComponentLink1URL=http://www.yageo.com/, ComponentLink2Description=Datasheet, ComponentLink2URL=http://www.yageo.com/documents/recent/PYu-RC_Group_51_RoHS_L_04.pdf, DatasheetVersion="Rev. 4, 02/2016", PackageDescription="2-Pin Surface Mount Device, Body 1.6 x 0.8 mm", PackageReference=0603, RoHSCompliant=true
R10: library part CMP-1659-00009-4, "Chip Resistor, 1 KOhm, +/-1%, 0.1 W, -55 to 155 degC, 0603 (1608 Metric), RoHS, Tape and Reel", Manufacturer=Yageo, Max Operating Temperature="155 degC", Min Operating Temperature="-55 degC", Package Quantity=200, Voltage Rating="50 V", ComponentLink1Description="Manufacturer URL", ComponentLink1URL=http://www.yageo.com/, ComponentLink2Description=Datasheet, ComponentLink2URL=http://www.yageo.com/documents/recent/PYu-RC_Group_51_RoHS_L_04.pdf, ComponentLink3Description="Package Specification", ComponentLink3URL=http://www.farnell.com/datasheets/443971.pdf, DatasheetVersion="Rev. 4, 02/2016", Height="0.45 mm", Length="1.6 mm", Mount="Surface Mount", Mounting Technology="Surface Mount", PackageDescription="2-Pin Surface Mount Device, Body 1.6 x 0.8 mm", PackageReference=0603, Packaging="Tape and Reel", Pins=2, REACH SVHC="No SVHC", RoHSCompliant=true
R11: library part CMP-2000-06934-1, "Thick Film Resistor, 2.2 KOhm, 100 mW, 50 V, +/- 1%, -55 to 155 degC, 2-Pin SMD (0603), RoHS, Tape and Reel", Case Code - in=0603, Case Code - mm=1608, Manufacturer=Yageo, Operating Temperature Range=-55Cto+155C, Package Description="2-Pin Surface Mount Device, Body 1.6 x 0.8 mm", Power Rating=100mW, Resistance=2.2kOhms, Temperature Coefficient=100PPM/C, Tolerance=1%, Voltage Rating=50V, Datasheet URL=http://www.yageo.com/documents/recent/PYu-RC_Group_51_RoHS_L_7.pdf, Datasheet Version="Rev. 7, 05/2017", Manufacturer URL=http://www.yageo.com/, Mounting Technology=SurfaceMount, Package Reference=0603, Packaging=Reel, Product=ThickFilmResistorsGeneralPurpose, Series=RC, Termination Style=SMD/SMT
R12 R13 R14 R15 R16: library part CMP-03412-001484-1, "RES SMD 510 OHM 1% 1/10W 0603", Manufacturer=Yageo, Manufacturer Part Number=AC0603FR-07510RL, Package=AC0603, Power Rating=0.1W, Resistance=510Ω, Temperature="-55°C to +155°C", Temperature Range High=+155°C, Temperature Range Low=-55°C, Tolerance=0.01, Voltage Rating=75V, Automotive=Yes, Automotive Grade="Grade 0", Category=Res, ComponentLink2Description=Datasheet, ComponentLink2URL=http://www.yageo.com/NewPortal/yageodocoutput?fileName=/pdf/R-Chip/PYu-AC_51_RoHS_L_6.pdf, Composition="Thick Film", Device Class L1="Passive Components", Device Class L2=Resistors, Device Class L3="Chip SMD Resistors", Digikey Description="RES SMD 510 OHM 1% 1/10W 0603", Footprint Url=http://www.yageo.com/exep/pages/download/literatures/PYu-R_Mount_9.pdf, Height=0.55mm, Ipc Land Pattern Name=RESC16080X45, Lead Free=Yes, Octopart=https://octopart.com/ac0603fr-07510rl-yageo-33978667, RoHS=TRUE, Series=AC
R17 R18: library part CMP-2100-03663-1, "Chip Resistor, 100 Ohm, +/- 1%, 0.1 W, -55 to 155 degC, 0603 (1608 Metric), RoHS, Tape and Reel", Case Code (Imperial)=0603, Case Code (Metric)=1608, Manufacturer=Yageo, Max Operating Temperature=155degC, Min Operating Temperature=-55degC, Package Description="2-Pin Surface Mount Device, Body 1.6 x 0.8 mm", Power Rating=100mW, Resistance=100Ohm, Temperature Coefficient=100ppm/degreesC, Tolerance=1%, Voltage Rating=50V, Case/Package=0603, Composition=ThickFilm, Datasheet URL=http://www.yageo.com/NewPortal/yageodocoutput?fileName=/pdf/R-Chip/PYu-RC_Group_51_RoHS_L_5.pdf, Datasheet Version="Rev. 5, 10/2016", Depth=0.8mm, Height=0.45mm, Lead Free=LeadFree, Length=1.6mm, Manufacturer URL=http://www.yageo.com/, Military Standard=Not, Number of Pins=2, Package Reference=0603, Packaging=TapeandReel, REACH SVHC=Unknown, RoHSCompliant=true, Termination=SMD/SMT, Voltage Rating (DC)=50V, Width=0.8mm
SUSPND: library part CMP-1426-00017-1, "SMD mono-color Chip LED, WL-SMCW, Super Red", Color="Super Red", Manufacturer="Wuerth Elektronik", ComponentLink1Description="Manufacturer URL", ComponentLink1URL=http://www.we-online.com, ComponentLink2Description=Datasheet, ComponentLink2URL=http://katalog.we-online.com/led/datasheet/150120SS75000.pdf, PackageReference=1206_A, PartNumber=150120SS75000
U1: library part CMP-209535-000001-1, "LDO Voltage Regulators 1A, 3.3V", Dropout Voltage=1.1V, Manufacturer="Advanced Monolithic Systems", Max Junction Temp=+125°C, Max Power Dissipation=1.2W, Max Supply Voltage=15V, Nominal Supply Current=5mA, Output Current=1A, Output Voltage=3.3V, Package=AMS1117, Temperature="-40°C to +125°C", Temperature Range Low=-40°C, Automotive=No, Category=IC, ComponentLink2Description=Datasheet, ComponentLink2URL=http://www.advanced-monolithic.com/pdf/ds1117.pdf, Device Class L1="Integrated Circuits (ICs)", Device Class L2="Power Management ICs", Device Class L3="Voltage Regulators - Linear", Height=1.8mm, Ipc Land Pattern Name=SOT229P700X180-4, Lead Free=Yes, Manufacturer Part Number=AMS1117-3.3, Number Of Outputs=1, Octopart=https://octopart.com/ams1117-3.3-advanced+monolithic+systems-25899300, Output Type=Fixed, RoHS=TRUE, Standoff Height=0.64mm, Temperature Range High=+125°C
U2: library part CMP-0309-00077-2, "2 / 3-Port Hub for USB with Optional Serial EEPROM Interface, 3.3V, 0 to 70 degC, 32-Pin LQFP (VF), Green (RoHS & no Sb/Br)", Manufacturer="Texas Instruments", Supply Voltage(s)(V)=3.3, ComponentLink1Description=Datasheet, ComponentLink1URL=http://www.ti.com/general/docs/lit/getliterature.tsp?genericPartNumber=TUSB2036&fileType=pdf, ComponentLink2Description="Package Specification", ComponentLink2URL=http://www.ti.com/litv/pdf/mtqf002b, DatasheetVersion=SLLS372E, Eco-Plan="Green (RoHS & no Sb/Br)", Integrated MCU Architecture=N/A, Mounting Technology="Surface Mount", PackageDescription="32-Pin Plastic Quad Flatpack, 7 x 7 mm Body, 0.8 mm Pitch", PackageReference=VF0032A, PackageVersion="revD, Apr-2000", PartNumber=TUSB2036VF, SubFamily="USB Hub Controller", USB Full Speed=True, USB Speed=Full
U3: library part CMP-0162-00322-1, "1K, 64x16-bit, 1.8V Microwire Serial EEPROM, 6-Pin SOT-23, Industrial Temperature, Tape and Reel", Code_IPC=SOT26A-6, DatasheetVersion="revG, May-2008", PackageDescription="6-Lead Plastic Small Outline Transistor (OT) [SOT-23]", PackageReference=SOT-23-OT6, PackageVersion="revBB, Aug-2009"
U4: library part CMP-0337-00039-2, "Quad Current-Limited Power Distribution Switch, 1 A Current Limit, -40 to 85 degC, 16-pin SOIC (D), Green (RoHS & no Sb/Br)", Continuous Current(Max)(A)=0.5, Current Limit(A)=1, Manufacturer="Texas Instruments", Rating=Catalog, Code_JEDEC=MS-012AC, ComponentLink1Description=Datasheet, ComponentLink1URL=http://www.ti.com/general/docs/lit/getliterature.tsp?genericPartNumber=TPS2044B&fileType=pdf, DatasheetVersion=SLVS514L, Eco-Plan="Green (RoHS & no Sb/Br)", Enable="Active Low", Mounting Technology="Surface Mount", NEMKO=TRUE, Number of Switches=4, PackageDescription="16-Pin Plastic Small Outline Integrated Circuit, 9.9 x 3.9 mm, Pitch 1.27 mm Pitch", PackageReference=D0016A, PackageVersion="revM, Jun-2011", PartNumber=TPS2044BDR, rDS(on) per FET(Typ)(mOhms)=70, UL Listed=TRUE, Vin(Max)(V)=5.5, Vin(Min)(V)=2.7
USB-A1 USB-A2 USB-A3: library part CMP-1502-03227-1, "USB 2.0 Type A Receptacle WR-COM, Horizontal, THT", Contact Resistance=20mOhm, Manufacturer="Wurth Elektronik", Operating Temperature=-40to105degC, Rated Current=1.5A, Working Voltage=30VAC, Connector Type=USB2.0TypeA, Datasheet URL=https://katalog.we-online.de/em/datasheet/61400416021.pdf, Gender=Receptacle, Manufacturer URL=http://www.we-online.de, Mounting Technology=THT, Orientation=Horizontal, Package Reference=61400416021, Packaging=Tray, Part Number=61400416021, Publisher=WurthElektronik
USB-C: library part CMP-196119-000001-1, "CONN RCPT USB2.0 TYPEC 16POS", Current Rating=4.25A, Manufacturer="Global Connector Technology", Package=0, Temperature="-40°C to +85°C", Temperature Range High=+85°C, Temperature Range Low=-40°C, Voltage Rating=20V, Automotive=No, Category=Conn, ComponentLink2Description=Datasheet, ComponentLink2URL=https://gct.co/files/drawings/usb4085.pdf, Conn Orientation="Right Angle", Contact Material=Gold,Nickel, Device Class L1=Connectors, Device Class L2="USB Connectors", Device Class L3=unset, Digikey Description="CONN RCPT USB2.0 TYPEC 16POS", Height=3.66mm, Is Female=yes, Lead Free=Yes, Manufacturer Part Number=USB4085-GF-A, Number Of Contacts=16, Octopart=https://octopart.com/usb4085-gf-a-global+connector+technology-94773699, Pitch=0.85mm, RoHS=TRUE, Shielding=true, Usb Standard="USB 2.0"
Y1: library part CMP-2000-05725-1, "Low Profile Crystal, 14.7456 MHz, 18 pF, -20 to 70 degC, 2-Pin SMD, RoHS, Tape and Reel", Case Height=4.2mm, Case Length=11.4mm, Case Width=4.7mm, Frequency=14.7456MHz, Frequency Stability=50PPM, Load Capacitance=18pF, Manufacturer=ABRACON, Operating Temperature Range=-20Cto+70C, Package / Case=HC-49/US, Package Description="2-Pin Surface Mount Device, Body 11.4 x 4.7 mm", Package Reference=ABLS-14.7456MHZ-B2-T, Tolerance=20PPM, Brand=ABRACON, Datasheet URL=http://www.abracon.com/Resonators/abls.pdf, Datasheet Version=04/2011, Dimensions=4.7mmWx11.4mmLx4.2mmH, ESR=50Ohms, Factory Pack Quantity=1000, Manufacturer URL=http://www.abracon.com/, Mounting Style=SMD/SMT, Mounting Technology=SurfaceMount, Package URL=http://www.abracon.com/Support/PackageDrawing/Resonators/ABLS-2D.pdf, Packaging=Reel, Product Category=Crystals, RoHS=Details, Series=ABLS, Termination Style=SMD/SMT, Type=LowProfileMicroprocessorCrystal

## Free pads (board coordinates)
  round 137.8 hole 98.43: 32(118.11,787.4) 32(1456.69,787.4)

## Via types
v1: diameter 20, hole 10, Top Layer to Bottom Layer, 50 vias

## Nets (pads, with @x,y where several pads share a name; then routed paths per layer and width w, separated by ;. In a path a pad name is that pad's centre, name@x,y a point inside that pad or via, vN(x,y) a via of type N, cw(c..) or ccw(c..) an arc to the next point about the centre after c; other vN are vias at no path point)
+3V3: C3.2 C9.1 C10.1 C11.1 Q1.2 R6.1 R7.2 R8.2 R9.2 R12.2 R17.2 U1.2 U1.4 U2.3 U2.25 U3.6 | length 5043.2
  Top Layer w10: v1(43.31,261.81) 43.31,483.27 109.25,549.21 109.25,593.5 94.49,608.27 61.02,608.27 31.5,637.8 31.5,838.58 81.69,888.78 231.3,888.78 282.48,837.6 R12.2 331.69,748.03 372.05,707.68 483.27,707.68 491.14,699.8 491.14,678.15 500,669.29 Q1.2 ; U3.6 v1(336.61,390.75) 376.97,431.1 437.01,431.1 446.85,440.94 U2.3 560.04,440.94 566.04,434.94 v1(597.34,434.94) 706.59,434.94 779.53,507.87 U2.25 810.2,560.04 v1(832.68,582.52) ; v1(427.17,61.02) 493.52,61.02 502.37,52.17 535.43,52.17 564.96,81.69 v1(564.96,149.61) ; R7.2 R8.2 R9.2 826.77,1213.58 v1(789.37,1250.98)
  Bottom Layer w10: v1(43.31,261.81) 45.16,263.66 101.49,263.66 116.14,249.02 116.14,63.98 150.43,29.69 395.83,29.69 v1(427.17,61.02) ; C11.1 v1(336.61,390.75) ; C10.1 492.45,511.15 492.45,433.73 C9.1 494.98,434.94 v1(597.34,434.94) 563.98,401.57 U1.4 U1.2 563.98,71.73 579.29,56.42 728.66,56.42 748.03,75.79 C3.2 824.8,110.24 R6.1 857.28,108.27 866.14,117.13 866.14,125 878.94,137.8 936.02,137.8 947.83,125.98 947.83,116.14 953.69,110.28 982.24,110.28 R17.2 ; v1(789.37,1250.98) 789.37,1215.55 858.03,1146.89 858.03,1060.79 837.6,1040.35 808.07,1040.35 790.35,1022.64 790.35,985.24 777.4,972.28 777.4,858.43 810.04,825.79 810.04,801.18 805.12,796.26 805.12,785.33 761.81,742.02 761.81,658.46 814.11,606.16 814.11,601.08 v1(832.68,582.52)
+5_USB_IN: C1.1 F-USB.1 USB-C.A4 USB-C.A9 USB-C.B4 USB-C.B9 | length 851
  Top Layer w10: F-USB.1 100.35,112.25 95.47,117.13 95.47,186.02 116.14,206.69 116.14,283.46 ; USB-C.A9 USB-C.B4 142.72,310.04 116.14,283.46 ; USB-C.A4 USB-C.B9 148.62,477.36 116.14,444.88 116.14,283.46
  Bottom Layer w10: USB-C.B4 138.78,264.76 138.78,194.88 151.57,182.09 181.1,182.09 196.85,166.34 C1.1
+5V: C2.1 C12.2 C13.1 F-USB.2 U1.3 U4.2 U4.6 | length 2958.5
  Top Layer w10: F-USB.2 293.45,106.4 v1(374.42,106.4) 374.42,60.62 400.59,34.45 1001.97,34.45 1024.61,57.09 1024.61,165.35 1016.73,173.23 v1(1016.73,218.5) ; U4.2 662.4,727.36 719.49,784.45 827.32,784.45 v1(828.58,783.19) ; v1(787.4,1288.39) 788.39,1289.37 C13.1@788.39,1336.61 ; C13.1 C13.1@788.39,1336.61 ; v1@828.58,784.45 833.66,784.45 862.4,755.71 U4.6 ; v1(868.11,577.76) 895.67,550.2 895.67,454.72 969.49,380.91 v1(969.49,368.11) ; C12.2 881.89,1336.61 C13.1@788.39,1336.61
  Bottom Layer w10: C2.1 353.3,134.89 360.37,127.82 360.37,123.07 374.42,109.02 v1(374.42,106.4) 374.47,106.45 473.77,106.45 U1.3 ; v1(787.4,1288.39) 817.91,1257.87 817.91,1209.65 873.03,1154.53 873.03,1047.24 850.39,1024.61 823.82,1024.61 807.09,1007.87 807.09,979.87 792.4,965.19 792.4,866.06 832.14,826.32 832.14,809.37 830.44,807.66 830.44,785.04 v1(828.58,783.19) 785.43,740.04 785.43,682.09 868.11,599.41 v1(868.11,577.76) ; v1(969.49,368.11) 1007.87,329.72 1007.87,227.36 v1(1016.73,218.5)
DP0PUR: R5.2 U2.27 | length 395.9
  Top Layer w10: U2.27 717.03,560.53 v1(717.03,609.74) v1@717.52,610.24
  Bottom Layer w10: R5.2 462.6,639.76 476.38,625.98 520.23,625.98 542.87,603.35 580.71,603.35 622.05,644.68 707.68,644.68 717.28,635.08 717.28,610.47 v1@717.52,610.24
EECLK: U2.5 U3.4 | length 126.3
  Top Layer w10: U3.4 411.42,374.02 417.32,379.92 500.98,379.92 U2.5
EEDATA: R10.1 U2.6 U3.3 | length 259.2
  Top Layer w10: R10.1 440.94,237.2 433.07,245.08 414.37,245.08 U3.3 411.42,285.43 444.88,318.9 444.88,337.6 453.74,346.46 U2.6
EXTMEM*: R17.1 R18.2 U2.26 | length 830.8
  Top Layer w10: U2.26 751.01,563.02 751.01,596.5 761.79,607.28 884.84,607.28 915.35,576.77 915.35,465.55 993.11,387.8 993.11,349.41 983.27,339.57 v1(936.02,339.57)
  Bottom Layer w10: v1(936.02,339.57) 967.52,339.57 984.74,322.34 R17.1@984.74,166.83 ; R17.1 985.24,166.34 1053.15,166.34 1054.13,167.32 R18.2
GND: C1.2 C2.2 C3.1 C4.2 C5.1 C6.1 C7.1 C8.1 C9.2 C10.2 C11.2 C12.1 C13.2 C14.1 C15.1 C16.2 C17.1 C18.2 C19.1 C20.1 C21.2 C22.1 C23.2 C24.1 C25.1 C26.2 C27.1 C28.2 pad.32 R3.1 R4.1 R18.1 R21.1 R22.1 R25.1 R26.1 R29.1 R30.1 U1.1 U2.7 U2.8 U2.21 U2.22 U2.23 U2.24 U2.28 U2.31 U3.2 U4.1 U4.5 USB-A1.4 USB-A1.Shell USB-A2.4 USB-A2.Shell USB-A3.4 USB-A3.Shell USB-C.1 USB-C.2 USB-C.3 USB-C.4 USB-C.A1 USB-C.A12 USB-C.B1 USB-C.B12 | length 143.5
  Bottom Layer w5: C6.1 300.2,529.53 300.2,505.88 303.13,502.95 403.54,502.95 C10.2
  other v1: 288.39,338.58
HUB1-DM: R19.2 R21.2 USB-A1.2 | length 169.9
  Bottom Layer w10: R19.2 R21.2 USB-A1.2
HUB1-DM-R: C14.2 R19.1 U2.11 | length 1499.4
  Top Layer w10: U2.11 v1(622.05,282.48)
  Bottom Layer w10: R19.1 287.4,1221.46 C14.2 115.16,1221.46 71.85,1178.15 71.85,965.55 202.76,834.65 202.76,755.91 383.86,574.8 497.05,574.8 645.67,426.18 645.67,341.04 622.05,317.42 v1(622.05,282.48)
HUB1-DP: R20.2 R22.2 USB-A1.3 | length 171.5
  Bottom Layer w10: R20.2 343.5,1139.76 411.42,1139.76 R22.2 USB-A1.3
HUB1-DP-R: C15.2 R20.1 U2.12 | length 1394.7
  Top Layer w10: U2.12 v1(653.54,282.48)
  Bottom Layer w10: R20.1 287.4,1140.75 C15.2 134.84,1140.75 89.57,1095.47 89.57,970.47 218.5,841.54 218.5,761.81 387.8,592.52 500.54,592.52 664.37,428.69 664.37,328.74 654.53,318.9 654.53,283.46 v1(653.54,282.48)
HUB2-DM: R23.2 R25.2 USB-A2.2 | length 169.9
  Bottom Layer w10: USB-A2.2 R25.2 R23.2
HUB2-DM-R: C19.2 R23.1 U2.15 | length 1465.8
  Top Layer w10: U2.15 v1@748.03,282.48
  Bottom Layer w10: v1@748.03,282.48 748.03,377.95 1136.81,766.73 1295.28,766.73 1468.5,939.96 1468.5,1104.33 1432.09,1140.75 C19.2 1376.97,1141.73 R23.1
  other v1: 748.37,281
HUB2-DP: R24.2 R26.2 USB-A2.3 | length 169.9
  Bottom Layer w10: USB-A2.3 R26.2 R24.2
HUB2-DP-R: C20.2 R24.1 U2.16 | length 1554.2
  Top Layer w10: U2.16 v1(779.53,282.48)
  Bottom Layer w10: v1(779.53,282.48) 779.53,283.46 778.54,284.45 779.53,285.43 779.53,384.84 1144.68,750 1300.2,750 1484.25,934.06 1484.25,1184.06 1446.85,1221.46 C20.2 1376.97,1220.47 R24.1
HUB3-DM: R27.2 R29.2 USB-A3.2 | length 169.9
  Bottom Layer w10: USB-A3.2 R29.2 R27.2
HUB3-DM-R: C24.2 R27.1 U2.19 | length 1172.5
  Top Layer w10: U2.19 v1(890.75,346.46)
  Bottom Layer w10: v1(890.75,346.46) 892.6,348.31 892.6,364.06 892.72,364.17 892.72,383.86 980.32,471.46 980.32,556.1 1031.5,607.28 1096.46,607.28 1143.7,560.04 1413.39,560.04 1472.44,500.98 1472.44,388.78 1437.01,353.35 C24.2 1376.97,354.33 R27.1
HUB3-DP: R28.2 R30.2 USB-A3.3 | length 169.9
  Bottom Layer w10: USB-A3.3 R30.2 R28.2
HUB3-DP-R: C25.2 R28.1 U2.20 | length 1017
  Top Layer w10: U2.20 v1(937.01,377.95)
  Bottom Layer w10: v1@937.01,376.97 v1(937.01,377.95) 997.05,437.99 997.05,544.29 1030.51,577.76 1094.49,577.76 1128.94,543.31 1403.54,543.31 1454.72,492.13 1454.72,451.77 1437.01,434.06 C25.2 1376.97,433.07 R28.1
HUB-RST: C4.1 R6.2 U2.4 U3.5 | length 1535.4
  Top Layer w10: v1(288.39,230.32) 288.39,283.46 300.2,295.28 363.19,295.28 373.03,305.12 373.03,331.69 374.02,332.68 U3.5 374.02,377.95 405.51,409.45 U2.4 ; v1(821.85,57.09) 935.04,57.09 954.72,76.77 954.72,228.35 v1(927.17,255.91)
  Bottom Layer w10: v1(288.39,230.32) 288.39,197.83 303.15,183.07 461.61,183.07 501.97,142.72 501.97,67.91 533.46,36.42 801.18,36.42 v1(821.85,57.09) ; R6.2@846.46,167.32 C4.1 905.51,234.25 v1(927.17,255.91)
NetC7_2: C7.2 U2.30 Y1.1 | length 453.3
  Top Layer w10: v1(557.09,625.98) 568.9,614.17 609.25,614.17 622.05,601.38 U2.30
  Bottom Layer w10: v1(557.09,625.98) 557.09,656.5 599.41,698.82 599.41,943.9 C7.2
NetC8_2: C8.2 R11.1 Y1.2 | length 354.7
  Bottom Layer w10: C8.2 888.78,940.94 887.8,939.96 887.8,895.67 910.43,873.03 954.72,873.03 974.41,853.35 Y1.2 R11.1
NetDEVICE1_1: DEVICE1.1 R14.2 | length 301.1
  Top Layer w10: DEVICE1.1 312.99,1515.75 326.77,1529.53 440.94,1529.53 474.41,1496.06 R14.2
NetDEVICE1_2: DEVICE1.2 DEVICE2.2 DEVICE3.2 Q1.3 | length 4476.7
  Top Layer w10: Q1.3 360.24,748.03 305.12,803.15 305.12,841.54 241.14,905.51 65.94,905.51 29.69,941.77 29.69,1479.49 65.94,1515.75 DEVICE1.2 167.32,1515.75 187.01,1496.06 187.01,1441.93 239.17,1389.76 324.8,1389.76 373.03,1341.54 453.74,1341.54 517.72,1405.51 592.52,1405.51 680.12,1493.11 926.18,1493.11 958.66,1460.63 958.66,1427.17 980.32,1405.51 1086.61,1405.51 1138.78,1353.35 1288.39,1353.35 1386.81,1451.77 1386.81,1492.13 1411.42,1516.73 1445.87,1516.73 1446.85,1515.75 DEVICE2.2 1507.87,1515.75 1538.39,1485.24 1538.39,1423.23 1538.39,69.88 1527.56,59.06 DEVICE3.2
NetDEVICE2_1: DEVICE2.1 R15.2 | length 301.1
  Top Layer w10: R15.2 1101.38,1496.06 1134.84,1529.53 1218.5,1529.53 1231.3,1516.73 1337.6,1516.73 DEVICE2.1
NetDEVICE3_1: DEVICE3.1 R16.2 | length 299.4
  Top Layer w10: R16.2 1101.38,78.74 1132.87,47.24 1250,47.24 1261.81,59.06 DEVICE3.1
NetQ1_1: Q1.1 R13.2 | length 105.3
  Top Layer w10: R13.2 Q1.1
NetR3_2: R3.2 USB-C.A5 | length 254.9
  Bottom Layer w10: R3.2 127.95,440.94 130.91,443.9 153.54,443.9 161.26,451.61 161.26,520.27 174.61,533.62 193.5,533.62 213.11,514.01 213.11,467.99 USB-C.A5
NetR4_2: R4.2 USB-C.B5 | length 56.1
  Bottom Layer w10: R4.2 USB-C.B5
NetR10_2: R10.2 U3.1 | length 109.7
  Top Layer w10: U3.1 336.61,194.88 354.33,177.17 R10.2
NetR11_2: R11.2 U2.29 | length 386.8
  Top Layer w10: U2.29 652.56,561.02 652.56,604.33 665.35,617.13 687.99,617.13 701.77,630.91 768.7,630.91 777.07,622.54 904.04,622.54 v1(923.23,603.35)
  Bottom Layer w10: v1(923.23,603.35) R11.2
NetR12_1: R12.1 SUSPND.2 | length 157.2
  Top Layer w10: SUSPND.2 104.33,669.29 105.32,670.28 148.62,670.28 160.43,682.09 160.43,694.88 213.58,748.03 R12.1
OVRCUR1: R7.1 U2.10 U4.16 | length 1221.7
  Top Layer w10: U2.10 590.55,297.24 610.24,316.93 654.53,316.93 731.3,393.7 731.3,430.12 v1(766.73,465.55) ; v1(592.52,1019.68) 612.4,999.8 U4.16 612.4,852.17 647.64,816.93 v1(785.43,816.93) ; v1(669.29,1063.98) R7.1
  Bottom Layer w10: v1(592.52,1019.68) 636.81,1063.98 v1(669.29,1063.98) ; v1(766.73,465.55) 766.73,631.89 744.09,654.53 744.09,745.52 785.43,786.86 v1(785.43,816.93)
OVRCUR2: R8.1 U2.14 U4.13 | length 1017.6
  Top Layer w10: U2.14 v1(716.54,319.88) ; v1(738.19,974.41) 762.4,950.2 U4.13 ; v1(748.03,1063.98) R8.1
  Bottom Layer w10: v1(716.54,319.88) 716.54,569.88 742.13,595.47 742.13,631.89 725.39,648.62 725.39,748.03 762.4,785.04 762.4,950.2 v1(738.19,974.41) 738.19,1051.51 748.03,1061.36 v1(748.03,1063.98)
OVRCUR3: R9.1 U2.18 U4.9 U4.12 | length 1372.6
  Top Layer w10: v1(765.75,993.11) 792.17,993.11 812.4,972.87 812.4,952.17 ; v1(826.77,1063.98) R9.1 ; U2.18 987.2,314.96 1011.81,339.57 1011.81,701.77 901.57,812.01 839.57,812.01 812.4,839.17 U4.12 812.4,952.17 ; U4.9 962.4,950.98 945.87,967.52 827.76,967.52 812.4,952.17
  Bottom Layer w10: v1(765.75,993.11) 765.75,1035.43 794.29,1063.98 v1(826.77,1063.98)
PWRON1: R14.1 U2.9 U4.3 | length 1504
  Top Layer w10: U2.9 559.06,296.26 673.23,410.43 v1(689.96,410.43) ; v1(565.94,1268.7) 565.94,870.08 635.83,800.2 v1(635.83,618.11) 650.59,632.87 682.09,632.87 697.91,648.7 704.61,648.7 712.4,656.5 U4.3 ; v1(584.65,1438.98) R14.1
  Bottom Layer w10: v1(565.94,1268.7) 565.94,1420.28 v1(584.65,1438.98) ; v1(635.83,618.11) 635.83,489.17 689.72,435.28 689.72,410.67 v1(689.96,410.43)
PWRON2: R15.1 U2.13 U4.4 | length 1648.5
  Top Layer w10: U2.13 685.04,325.79 709.65,350.39 740.16,350.39 757.87,368.11 v1(757.87,422.24) ; U4.4 761.81,676.77 761.81,723.66 783.23,745.08 v1(833.66,745.08) ; R15.1 990.16,1456.36 999.02,1447.5 v1(999.02,1444.88)
  Bottom Layer w10: v1(757.87,422.24) 896.65,561.02 896.65,672.24 849.84,719.06 849.84,726.28 833.66,742.46 v1(833.66,745.08) 835.63,745.08 848.43,757.87 848.43,832.68 807.4,873.7 807.4,958.98 822.83,974.41 822.83,997.05 835.39,1009.61 856.61,1009.61 888.03,1041.03 888.03,1219.72 999.02,1330.71 v1(999.02,1444.88)
PWRON3: R16.1 U2.17 U4.7 U4.8 | length 906.9
  Top Layer w10: U2.17 v1(890.75,283.46) 949.8,283.46 990.16,243.11 R16.1 ; U4.7 U4.8 962.4,503.74 v1(937.01,478.35)
  Bottom Layer w10: v1(890.75,283.46) 853.35,283.46 827.76,309.06 827.76,411.42 894.68,478.35 v1(937.01,478.35)
SUSPEND: R13.1 SUSPND.1 U2.32 | length 444.4
  Top Layer w10: SUSPND.1 R13.1 282.48,646.65 267.72,631.89 267.72,608.27 278.54,597.44 410.43,597.44 447.83,560.04 U2.32
USBA1-PWR: C16.1 C17.2 C18.1 U4.15 USB-A1.1 | length 936.3
  Top Layer w10: USB-A1.1 562.01,1318.9 591.54,1289.37 591.54,1080.71 662.4,1009.84 U4.15
  Bottom Layer w10: C16.1 138.8,1370.08 C17.2 198.82,1368.11 C18.1 344.49,1368.11 393.7,1318.9 508.86,1318.9 509.84,1319.88 510.83,1318.9 USB-A1.1
USBA2-PWR: C21.1 C22.2 C23.1 U4.14 USB-A2.1 | length 901.1
  Top Layer w10: U4.14 712.4,992.91 735.24,1015.75 969.49,1015.75 997.05,1043.31 USB-A2.1
  Bottom Layer w10: C21.1 1063.39,945.49 1063.39,1028.94 1063.98,1029.53 1063.39,1030.12 USB-A2.1 1176.18,1043.31 1225.39,994.09 C23.1 1375.98,994.09 C22.2
USBA3-PWR: C26.1 C27.2 C28.1 U4.10 U4.11 USB-A3.1 | length 1595.6
  Top Layer w10: U4.11 U4.10 912.4,831.69 932.09,812.01 1207.68,812.01 1263.78,755.91 1263.78,306.1 1213.58,255.91 USB-A3.1
  Bottom Layer w10: USB-A3.1 1063.39,256.3 1064.96,257.87 1066.93,255.91 1181.1,255.91 1230.31,206.69 C28.1 1301.18,204.72 C27.2 1436.01,204.72 C26.1
USBC-DM: C5.2 R2.2 U2.2 | length 198.8
  Top Layer w10: R2.2 v1(451.77,472.44) U2.2
  Bottom Layer w10: C5.2 v1(451.77,472.44)
USBC-DM-R: R2.1 USB-C.A7 USB-C.B7 | length 244.5
  Top Layer w10: USB-C.B7 217.52,376.97 USB-C.A7 272.64,376.97 307.09,411.42 307.09,458.66 320.87,472.44 R2.1
USBC-DP: C6.2 R1.2 R5.1 U2.1 | length 609.8
  Top Layer w10: v1(274.61,575.79) 283.46,566.93 314.29,566.93 324.13,576.77 384.84,576.77 395.67,565.94 395.67,536.42 R1.2 v1(448.33,531.5) 496.06,531.5 502.95,524.61 U2.1 ; v1(295.03,623.03) 395.67,623.03 v1(403.54,630.91)
  Bottom Layer w10: v1(274.61,575.79) 295.03,596.21 v1(295.03,623.03) ; C6.2 354.33,530.51 354.33,530.87 369.02,545.56 435.37,545.56 448.33,532.59 v1(448.33,531.5) ; v1(403.54,630.91) R5.1
USBC-DP-R: R1.1 USB-C.A6 USB-C.B6 | length 279.9
  Top Layer w10: USB-C.A6 275.59,410.43 286.42,421.26 286.42,510.83 307.09,531.5 R1.1
  Bottom Layer w10: USB-C.B6 217.52,410.43 USB-C.A6
pads on no net: USB-C.A8 USB-C.B8

## Polygon pours and split planes (outlines as drawn)
GND on Top Layer "gnd-top" (solid, pour order 0): 0,1574.8 1574.8,1574.8 1574.8,0 0,0
GND on Bottom Layer "gnd-bottom" (solid, pour order 1): 0,1574.8 1574.8,1574.8 1574.8,0 0,0

## Keep-outs
Keep-Out Layer:
  the board outline again, w39.37

## Silkscreen, mask and mechanical layers (free items; w line width, h text height)
Bottom Overlay:
  text "USB2 ONLY" at 1043.15,1366.3 h60

## Text inside footprints (layer, text, board x,y; h text height)
USB-A1: Mechanical 2 "PCB Edge" at -48.03,1267.72 h32 r270
USB-A2: Mechanical 2 "PCB Edge" at 1622.83,1094.49 h32 r90
USB-A3: Mechanical 2 "PCB Edge" at 1622.83,307.09 h32 r90